# EAGLE board board (EAGLE 7.2.0)
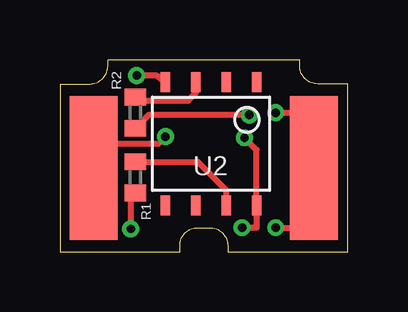
[diagram p0: board, top side]
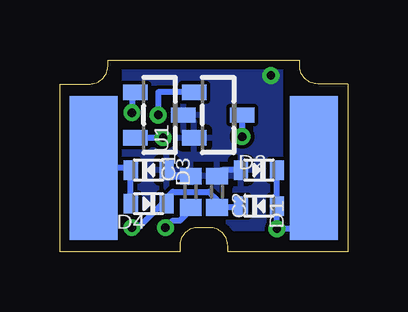
[diagram p1: board, bottom side, seen from below]

Size 12 x 8 mm. Coordinates in mm from the lower left corner, seen from the top.
Outline: 0,0 5,0 5,0.25 arc-90 5.75,1 6.25,1 arc-90 7,0.25 7,0 12,0 12,7 10.75,7 arc-90 10,7.75 10,8 2,8 2,7.75 arc-90 1.25,7 0,7 0,0
Copper layers (1*16): Top 0.0356mm / dielectric 1.5011mm / Bottom 0.0356mm
Design rules "POSHPARKPCBOrder": minimum track width 6mil, minimum drill 13mil, track to track 6mil, track to pad 6mil, pad to pad 6mil, via to via 6mil, smd to smd 6mil, copper to edge 15mil, drill to drill 6mil, minimum pad ring 7mil, minimum via ring 7mil, stop-mask expansion 3mil, vias tented up to drill 0mil, thermal gap 10mil

## Footprints (pad centres in the part's own frame; a part is rotated, then mirrored left to right if it is on the bottom)
SMD6MMX2MM = smd 6 x 2: P$1 0,0
C0402 = smd 0.7 x 0.9: 1 -0.65,0; 2 0.65,0
SOD-523 = smd 0.8 x 0.6: A 0,-0.75; K 0,0.75
SOT23-R = smd 0.635 x 1.016: 1 -0.95,-1; 2 0.95,-1; 3 0,1
R0402 = smd 0.7 x 0.9: 1 -0.65,0; 2 0.65,0
SOIC-8_SMALL = smd 0.4 x 0.835: P$1 1.905,2.58; P$2 0.635,2.58; P$3 -0.635,2.58; P$4 -1.905,2.58; P$5 -1.905,-2.58; P$6 -0.635,-2.58; P$7 0.635,-2.58; P$8 1.905,-2.58

## Placement (x,y rotation side)
+V  FR11_PAD6MMX2MM  [SMD6MMX2MM]  10.6,3.5 90 top
-V  FR11_PAD6MMX2MM  [SMD6MMX2MM]  1.4,3.5 90 top
C1  10uF  [C0402]  6.55,2.5 90 bottom
C2  10uF  [C0402]  5.45,2.5 90 bottom
D1  [SOD-523]  3.7,3.4 270 bottom
D2  [SOD-523]  3.7,1.9 90 bottom
D3  [SOD-523]  8.3,3.4 90 bottom
D4  [SOD-523]  8.3,2 270 bottom
DCC1  FR11_PAD6MMX2MM  [SMD6MMX2MM]  1.4,3.5 270 bottom
DCC2  FR11_PAD6MMX2MM  [SMD6MMX2MM]  10.6,3.5 270 bottom
Q1  [SOT23-R]  5.4,5.7 270 bottom
R1  3K3  [R0402]  3.15,3.1 90 top
R2  2K2  [R0402]  3.15,5.8 270 top
U1  [SOT23-R]  7.85,5.7 270 bottom
U2  ATTiny85  [SOIC-8_SMALL]  6.3,4.5 0 top

## Library data of the parts
+V -V DCC1 DCC2 = Shockley_Custom
C1 C2 R1 R2 = resistor
D1-D4 Q1 U1 = microbuilder
U2 = benjamin

## Nets
GND: C1.2 C2.2 D1.A D3.A Q1.2 U1.3 U2.P$4
N$1: R2.1 U2.P$3
N$3: R1.2 U2.P$7
N$4: -V.P$1 Q1.3
N$5: Q1.1 R2.2
N$10: C1.1 U1.2 U2.P$8
VIN: +V.P$1 C2.1 D2.K D4.K U1.1
XT1: D1.K D2.A DCC1.P$1 R1.1
XT2: D3.K D4.A DCC2.P$1

## Tracks (layer width: path | path; a pad name or v marks a point on that pad's centre or on a via)
GND  (via drill 0.35)
  Top 0.254: U2.P$4 4.03,7.35 v3.2,7.35
  Bottom 0.254: D1.A 5.2,3.4 arc-90 C2.2
  Bottom 0.305: D3.A 7.3,3.15 C1.2
  pour Bottom: 2.8,8 9.3,8 9.3,1 2.8,1
N$1
  Top 0.254: R2.1 3.15,6.3 5.35,6.3 5.67,6.62 U2.P$3
N$3
  Top 0.254: R1.2 5.75,3.75 6.93,2.56 U2.P$7
N$4  (via drill 0.35)
  Top 0.254: v4.4,4.8 4.1,4.5 1.7,4.5 1.4,4.2 -V.P$1
  Bottom 0.254: Q1.3 v4.4,4.8
N$5  (via drill 0.35)
  Top 0.254: 3.25,5.15 R2.2 3.7,5.7 v7.9,5.7
  Bottom 0.254: Q1.1 7.9,6.65 v7.9,5.7
N$10  (via drill 0.35)
  Top 0.254: v7.6,1 8.2,1 U2.P$8 8.21,4.25 v7.7,4.75
  Bottom 0.254: 6.55,1.65 C1.1 6.55,1.75 7,1.3 7.3,1.3 v7.6,1 | v7.7,4.75 U1.2
VIN  (via drill 0.35)
  Top 0.254: v9,5.8 10.6,5.8 +V.P$1 10.6,1.8 9.8,1 v9,1
  Bottom 0.254: D2.K 4.5,1.85 C2.1 5.45,2.15 5.8,2.5 7.3,2.5 7.55,2.25 D4.K 7.75,2 8.75,1 v9,1 | U1.1 9,6.65 v9,5.8
XT1  (via drill 0.35)
  Top 0.254: R1.1 2.95,2.25 v2.95,0.95
  Bottom 0.254: D1.K D2.A v2.95,0.95 1.4,0.95 DCC1.P$1
XT2
  Bottom 0.254: D4.A D3.K 9.15,3.5 DCC2.P$1 10.1,3